# Altium PCB HEBoard_Ver2.PcbDoc
Units mil, origin at the board's own origin, x right, y up, seen from the top; angles counter-clockwise.
Board outline 2031.5 x 2885.83 mil, 2 copper layers (Top Layer, Bottom Layer); 23 components, 16 nets, 118 pads, 8 vias.
Unrouted connection lines stored in the file: 4.
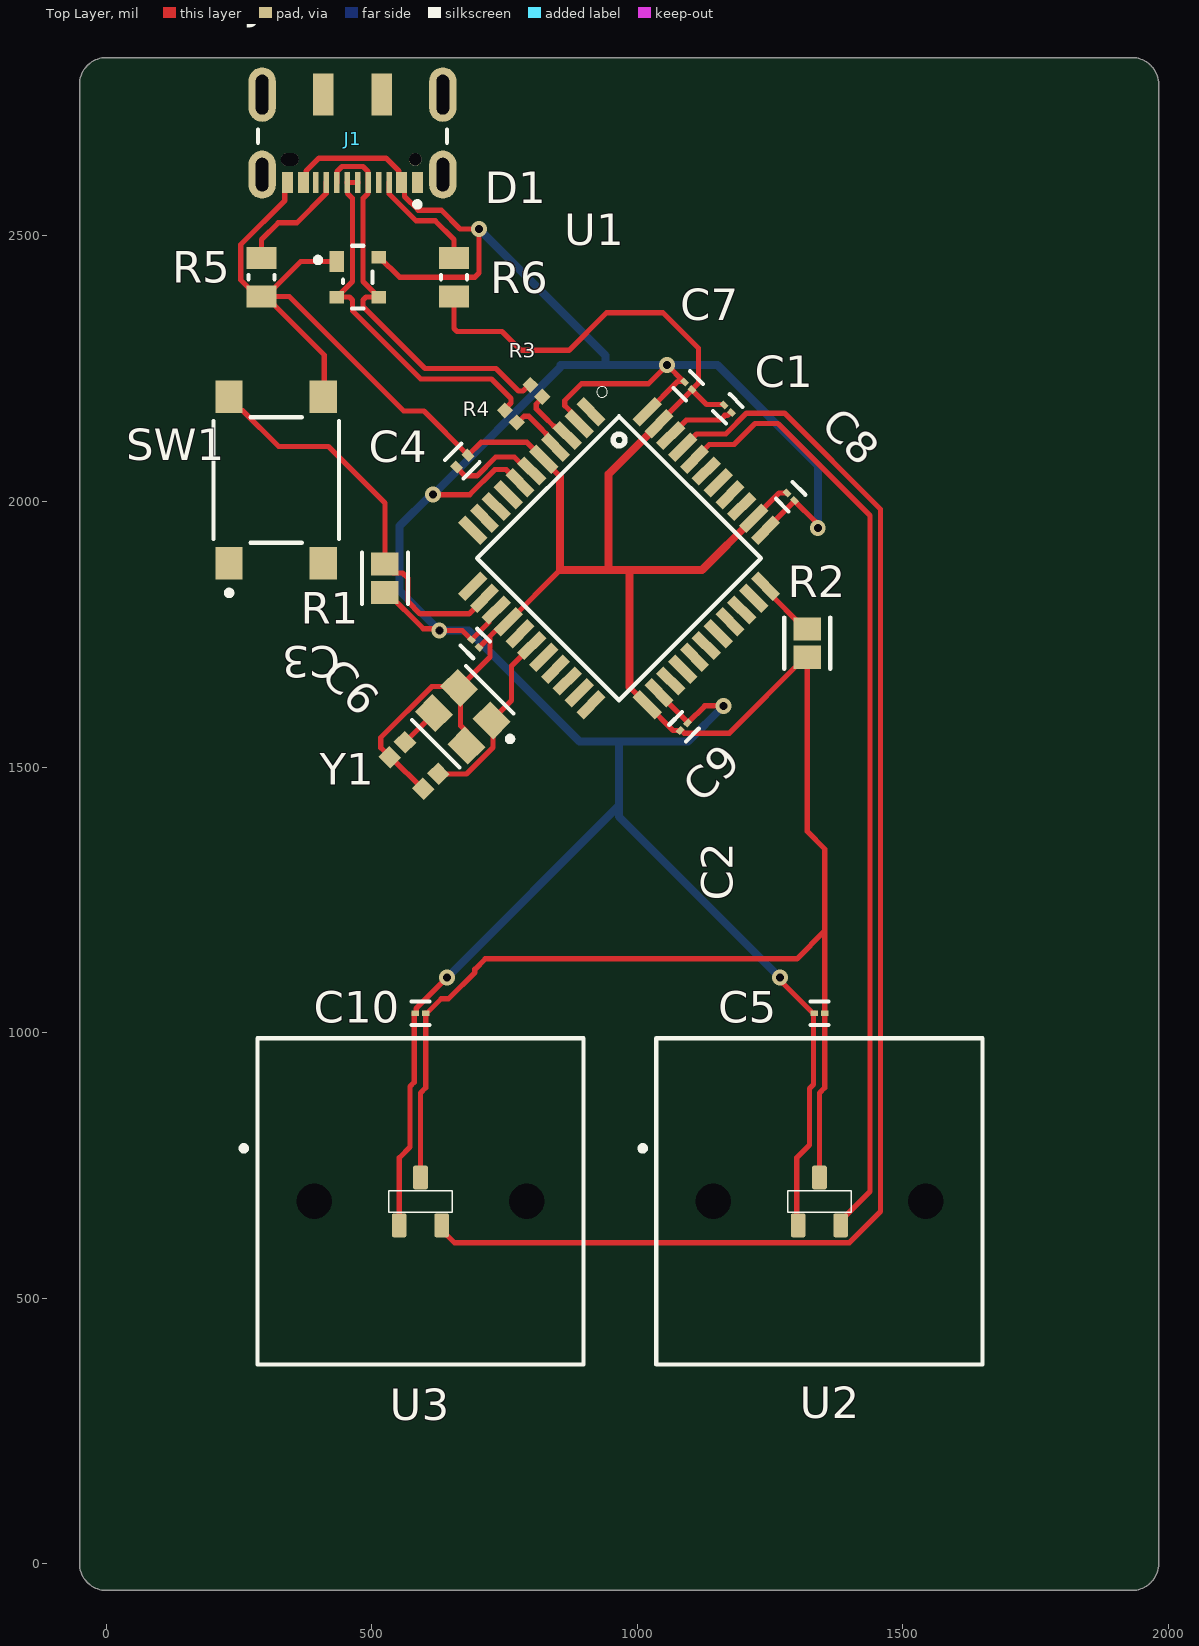
[diagram p0: Top Layer view]
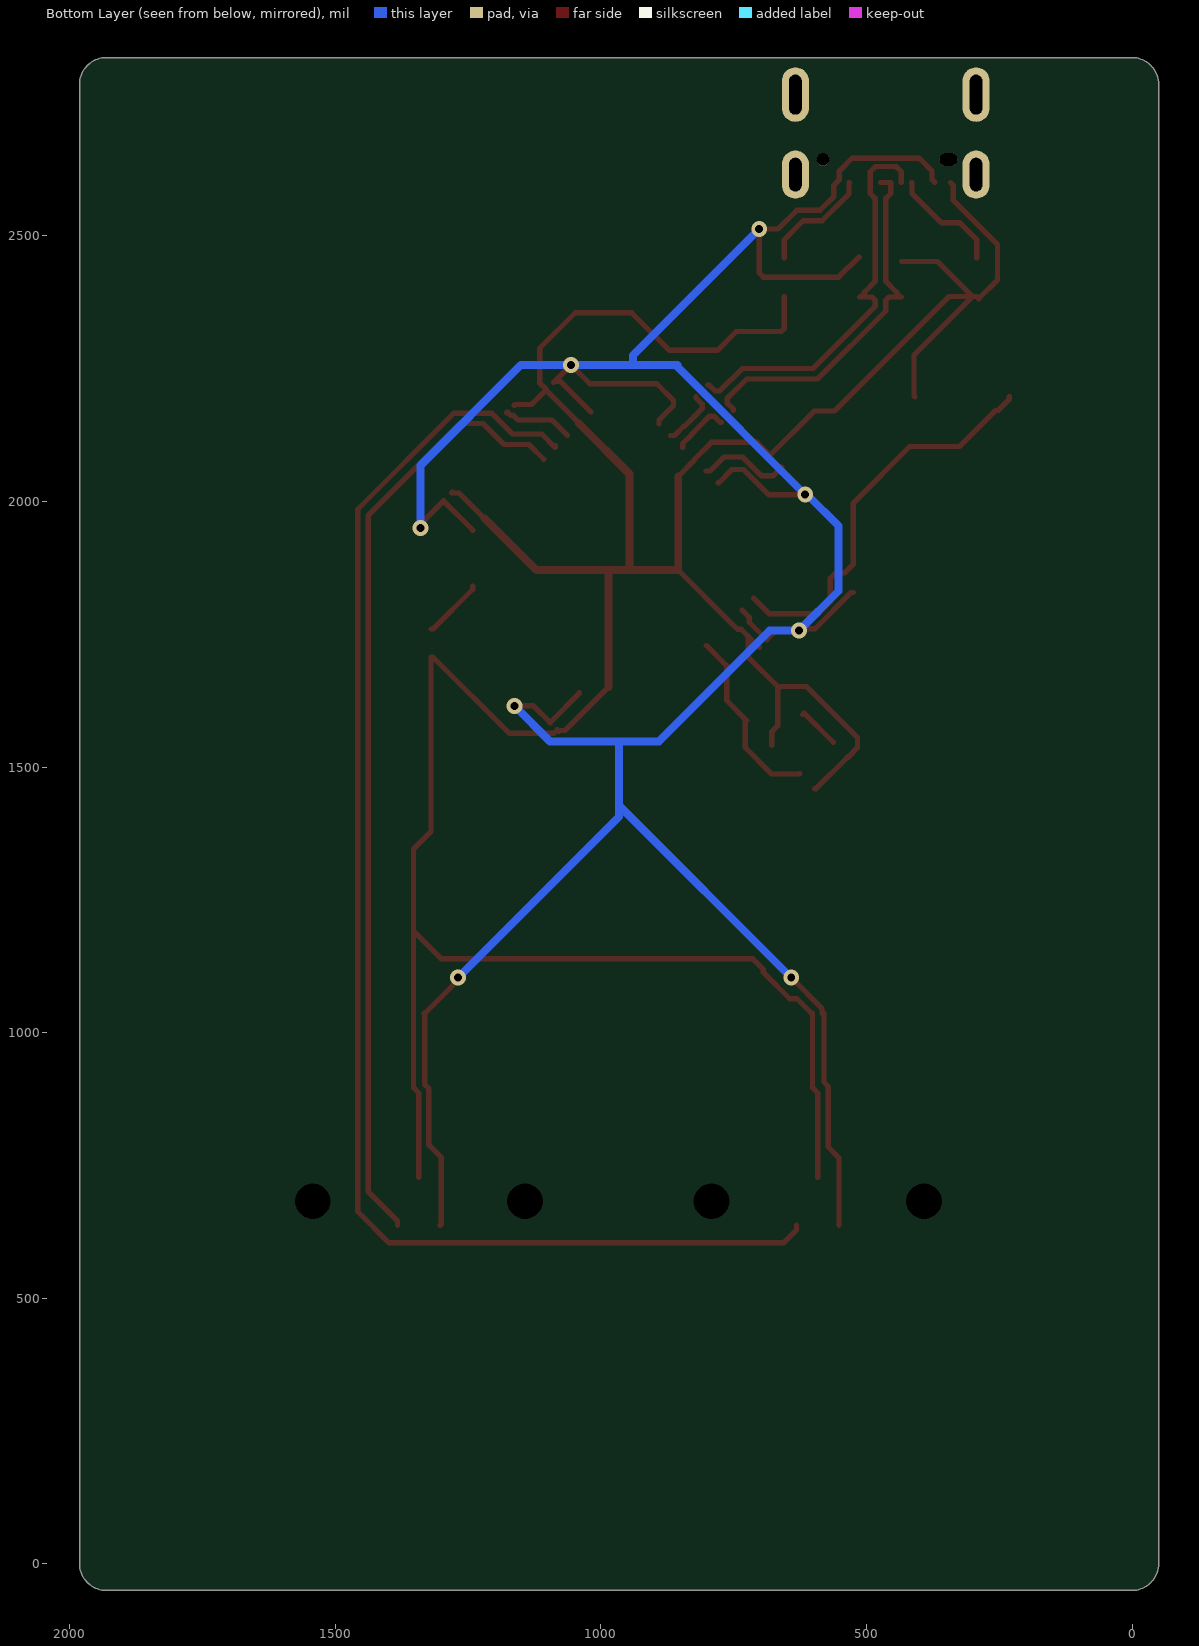
[diagram p1: Bottom Layer view, seen from below]
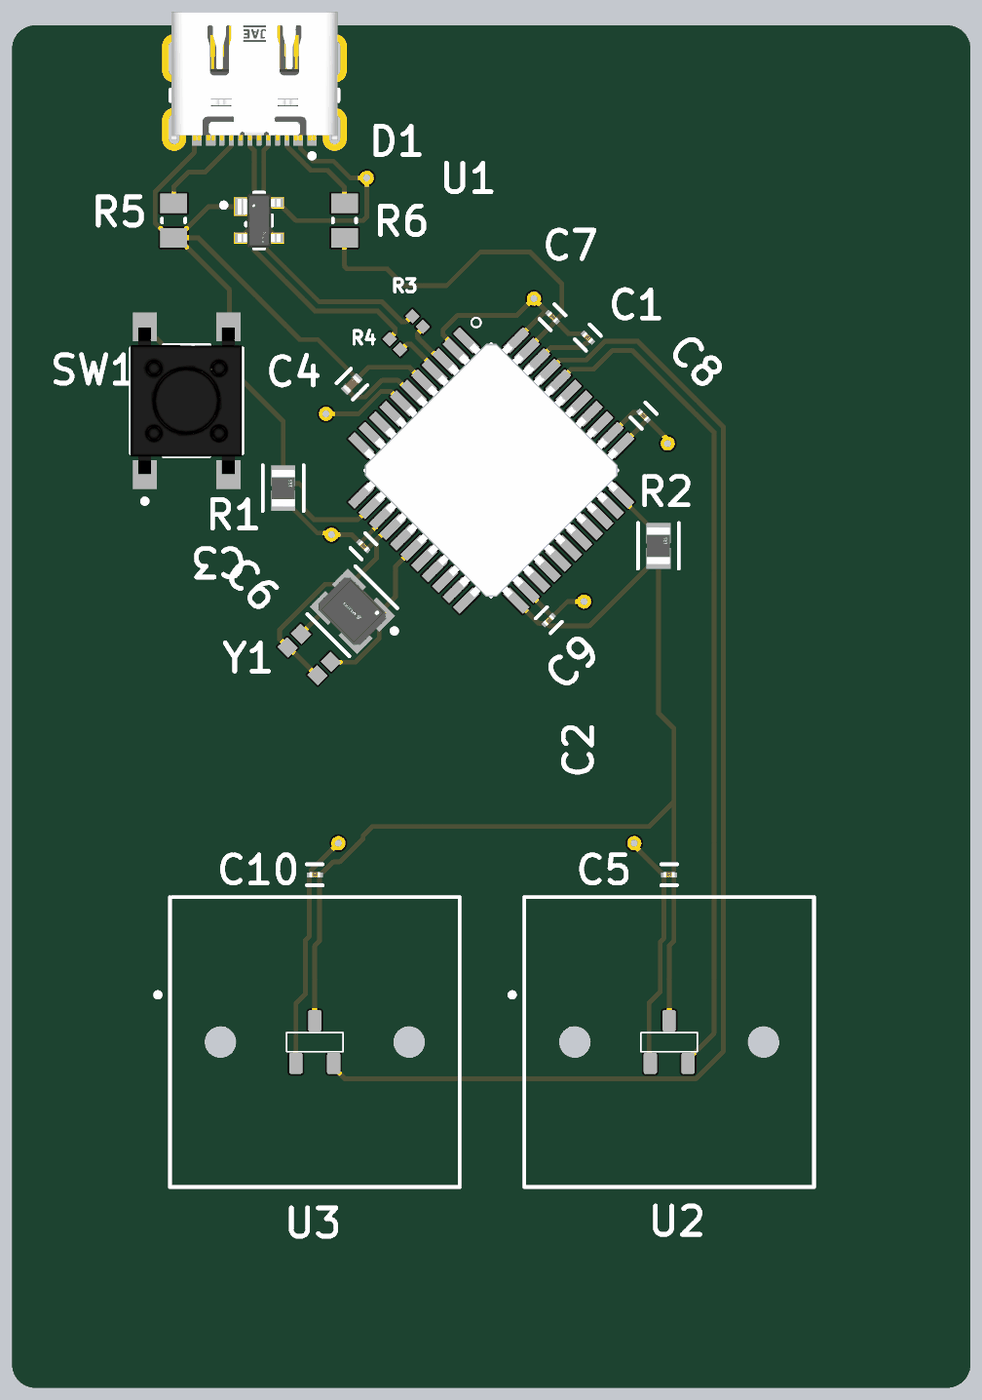
[diagram p2: 3D render of the assembled board from above, using the file's embedded part models]

## Layer stack, top to bottom
Top Solder: solder mask 0.4, Solder Resist, Dk 3.5
Top Layer: signal copper 1.4
Dielectric 1: dielectric 12.6, FR-4, Dk 4.8
Bottom Layer: signal copper 1.4
Bottom Solder: solder mask 0.4, Solder Resist, Dk 3.5

## Board outline
-50,0 ccw(c0,0) 0,-50 1931.5,-50 ccw(c1931.5,0) 1981.5,0 1981.5,2785.83 ccw(c1931.5,2785.83) 1931.5,2835.83 0,2835.83 ccw(c0,2785.83) -50,2785.83

## Design rules (kind name [scope] priority, off if disabled: settings)
Clearance [All] p1: gap=10 ignorepadtopadclearanceinfootprint=FALSE except(0: Arc-Hole Track-Hole SMDPad-Hole THPad-Hole Via-Hole Fill-Hole Poly-Hole Region-Hole Text-Hole; 5.51: Arc-Arc Arc-Track Arc-SMDPad Arc-Text Track-Track Track-SMDPad Track-Text SMDPad-SMDPad SMDPad-Text THPad-Text Via-Text Fill-Text Poly-Text Region-Text Text-Text)
DiffPairsRouting [All] p1: maxlimit=3937.01 minlimit=10 mostfreqgap=10 toplayer_mingap=0 toplayer_minwidth=10 toplayer_maxwidth=15 toplayer_prefwidth=10 bottomlayer_maxgap=10 bottomlayer_minwidth=15 bottomlayer_maxwidth=15 bottomlayer_prefwidth=15 maxuncoupledlength=500
MinimumSolderMaskSliver [All] p1: minsoldermaskwidth=2.76
PolygonConnect [All] p1: connectstyle=Relief reliefconductorwidth=10 reliefentries=4 polygonreliefangle="90 Angle" airgapwidth=10
RoutingVias [All] p1: holewidth=28 width=50 viastyle="Through Hole" minholewidth=15 minwidth=30 maxholewidth=28 maxwidth=50
SilkToSolderMaskClearance [IsPad] p1: minsilkscreentomaskgap=0.98 clearancetoexposedcopper=TRUE
SolderMaskExpansion [All] p1: expansion=4 istentingtop=FALSE
Width [InNet('D_P')] p1: maxlimit=15 minlimit=10 preferedwidth=10 toplayer_maxwidth=10 minimp=50.000000 maximp=50.000000 favimp=50.000000
27 further rules are at their usual default settings.

## Classes and differential pairs
differential pair D: +D_P -D_N

## Components (designator, comment, footprint, x,y, rotation, side; value= is the part's Value field where it differs from the comment)
C1 "0.1uF" FP-GRM033-0_03-IPC_C 1170.47,2174.41 r135 top
C2 "22pF" CAPC1006X50X20ML10T10 611.42,1473.62 r45 top
C3 "22pF" CAPC1006X50X20ML10T10 548.43,1532.68 r45 top
C4 "1uF" FP-GRM15-0_1-MFG 670.47,2075.98 r45 top
C5 "0.1uF" FP-GRM033-0_03-IPC_C 1342.91,1036.61 r0 top
C6 "0.1uF" FP-GRM033-0_03-IPC_C 694.89,1732.67 r315 top
C7 "0.1uF" FP-GRM033-0_03-IPC_C 1095.67,2217.72 r315 top
C8 "0.1uF" FP-GRM033-0_03-IPC_C 1288.58,2009.05 r135 top
C9 "0.1uF" FP-GRM033-0_03-IPC_C 1087.8,1575.98 r225 top
C10 "0.1uF" FP-GRM033-0_03-IPC_C 591.73,1036.61 r0 top
D1 "PRTR5V0U2X,215" FP-SOT143B-MFG 473.62,2422.44 r0 top
J1 "DX07S016JA1R1500" FP-DX07S016JA1R1500-MFG 463.78,2726.77 r180 top
R1 "10k 0.25W" FP-RNCP0805-IPC_C 524.8,1855.51 r270 top
R2 "10k 0.25W" FP-RNCP0805-IPC_C 1320.08,1733.46 r270 top
R3 "22R 1% 0201(0603)" RESC0201(0603)_M 809.92,2208.46 r135 top value="22.00 Ohm"
R4 "22R 1% 0201(0603)" RESC0201(0603)_M 761.83,2160.37 r135 top value="22.00 Ohm"
R5 "5.1K" RESC2013X60X30NL20T20 292.52,2422.44 r90 top
R6 "5.1K" RESC2013X60X30NL20T20 654.72,2422.44 r90 top
SW1 "" FP-PTS645SM43SMTR92LFS-MFG 320.08,2040.55 r90 top
U1 "ATMEGA32U4-AU" QFP80P1200X1200X120-44N 965.75,1893.21 r315 top
U2 "SS39ET" CHRY-MX1A-11NW_V 1342.91,682.28 r0 top
U3 "SS39ET" CHRY-MX1A-11NW_V 591.73,682.28 r0 top
Y1 "16 MHz" FP-ABM8G-MFG 671.27,1594.87 r135 top

## Footprints (in the part's own frame and the unit in brackets; to place one, negate y for a bottom-side part, rotate by r counter-clockwise, add the part's x,y. Pads: shape width x height; smd on the part's side, far side on the other; paste and mask are expansions set on the pad)
CAPC1006X50X20ML10T10 [mm] "Chip Capacitor, 2-Leads, Body 1.00x0.55mm, IPC Low Density"
  rect 0.74x0.8 smd: 1(-0.51,0) 2(0.51,0)
  body extent -0.55,-0.33 0.55,0.32, height 0.5
CHRY-MX1A-11NW_V [mil] "THD, 2-Leads, Body 15.6x15.6mm"
  rrect30% 28x45 smd: 1(-40,-45) 2(40,-45) 3(0,45)
  round 0 hole 67 unplated paste+0: MH2(-200,0) MH3(200,0)
  silkscreen extent -338,-307 307,307, body extent -307,-307 307,307, height 598
FP-ABM8G-MFG [mm]
  rect 1.4x1.2 smd paste+0 mask+0: 1(-1.1,-0.85) 2(1.1,-0.85) 3(1.1,0.85) 4(-1.1,0.85)
  silkscreen extent -2.47,-1.82 1.6,1.82, body extent -1.9,-1.55 1.9,1.55, height 0.25
FP-DX07S016JA1R1500-MFG [mm] "USB 3.1 Type C Receptacle Horizontal THR"
  rrect100% 1.3x2.3 hole 1.6 slot 0.6 at 0 deg paste-1000 mask+0: 1(-4.32,2.825) 2(4.32,2.825)
  rrect100% 1.3x2.6 hole 1.9 slot 0.6 at 0 deg paste-1000 mask+0: 3(-4.32,-1) 6(4.32,-1)
  rect 1x2 smd paste+0 mask+0: 4(-1.4,-1) 5(1.4,-1)
  rect 0.52x1 smd paste+0 mask+0: A1/B12(-3.1,3.2) A4/B9(-2.35,3.2) A12/B1(3.1,3.2) B4/A9(2.35,3.2)
  rect 0.27x1 smd paste+0 mask+0: A5(-1.75,3.2) A6(-0.25,3.2) A7(0.75,3.2) A8(1.75,3.2) B5(1.25,3.2) B6(0.25,3.2) B7(-0.75,3.2) B8(-1.25,3.2)
  round 0.6 hole 0.6 unplated paste-1000 mask+0: ""(-3,2.1)
  rrect100% 0.85x0.6 hole 0.6 slot 0.85 at 0 deg unplated paste-1000 mask+0: ""(3,2.1)
  silkscreen extent -4.52,0.67 4.52,4.37, body extent -5.07,-3.75 5.07,4.08, height 0.25
FP-GRM15-0_1-MFG [mm]
  rect 0.4x0.5 smd paste+0 mask+0: 1(-0.4,0) 2(0.4,0)
  silkscreen extent -0.55,-0.62 0.55,0.62, body extent -0.7,-0.38 0.7,0.38, height 0.25
FP-GRM033-0_03-IPC_C [mil]
  rect 13.94x10.34 smd paste+0 mask+0: 1(-10.01,0) 2(10.01,0)
  silkscreen extent -17,-22 17,22, body extent -21,-10 21,10, height 10
FP-PTS645SM43SMTR92LFS-MFG [mm]
  rect 1.55x1.3 smd paste+0 mask+0: 1(-3.975,2.25) 2(3.975,2.25) 3(-3.975,-2.25) 4(3.975,-2.25)
  silkscreen extent -5.52,-3 3,3, body extent -4.85,-3.1 4.85,3.1, height 0.25
FP-RNCP0805-IPC_C [mil]
  rect 43.52x51.5 smd paste+0 mask+0: 1(-26.63,0) 2(26.63,0)
  silkscreen extent -48,-43 48,43, body extent -52,-31 52,31, height 10
FP-SOT143B-MFG [mm]
  rect 0.7x1 smd paste-1000 mask+0: 1(-1,0.75)
  rect 0.7x0.6 smd paste-1000 mask+0: 2(-1,-0.95) 3(1,-0.95) 4(1,0.95)
  silkscreen extent -2.02,-1.5 0.7,1.5, body extent -1.5,-1.63 1.5,1.63, height 0.25
QFP80P1200X1200X120-44N [mm]
  rect 1.5x0.5 smd: 1(-5.9,4) 2(-5.9,3.2) 3(-5.9,2.4) 4(-5.9,1.6) 5(-5.9,0.8) 6(-5.9,0) 7(-5.9,-0.8) 8(-5.9,-1.6) 9(-5.9,-2.4) 10(-5.9,-3.2) 11(-5.9,-4) 23(5.9,-4) 24(5.9,-3.2) 25(5.9,-2.4) 26(5.9,-1.6) 27(5.9,-0.8) 28(5.9,0) 29(5.9,0.8) 30(5.9,1.6) 31(5.9,2.4) 32(5.9,3.2) 33(5.9,4)
  rect 0.5x1.5 smd: 12(-4,-5.9) 13(-3.2,-5.9) 14(-2.4,-5.9) 15(-1.6,-5.9) 16(-0.8,-5.9) 17(0,-5.9) 18(0.8,-5.9) 19(1.6,-5.9) 20(2.4,-5.9) 21(3.2,-5.9) 22(4,-5.9) 34(4,5.9) 35(3.2,5.9) 36(2.4,5.9) 37(1.6,5.9) 38(0.8,5.9) 39(0,5.9) 40(-0.8,5.9) 41(-1.6,5.9) 42(-2.4,5.9) 43(-3.2,5.9) 44(-4,5.9)
  silkscreen extent -6.45,-4.8 4.8,5.3, body extent -6,-6 6,6, height 0.53
RESC0201(0603)_M [mm] "Chip Resistor, Body 0.6x0.3mm, IPC Low Density"
  rect 0.55x0.55 smd: 1(-0.4,0) 2(0.4,0)
  body extent -0.31,-0.16 0.31,0.16, height 0.3
RESC2013X60X30NL20T20 [mm] "Chip Resistor, 2-Leads, Body 2.00x1.25mm, IPC Medium Density"
  rect 1.05x1.45 smd: 1(-0.925,0) 2(0.925,0)
  silkscreen extent -0.1,-0.63 0.1,0.63, body extent -1.1,-0.72 1.1,0.72, height 0.6

## Part data
C1 C5 C6 C7 C8 C9 C10: library part CMP-2010-01264-2, "Chip Multilayer Ceramic Capacitors for General Purpose, 0201, 0.10uF, X5R, 15%, 10%, 10V", Capacitance=100nF, Case Code (Imperial)=0201, Case Code (Metric)=0603, Dielectric=X5R, Max Operating Temperature=85°C, Min Operating Temperature=-55°C, Package Quantity=1, Tolerance=10%, Voltage=10V, Case/Package=0201, Depth=0.3mm, Height=0.3mm, Lead Free="Lead Free", Length=0.6mm, Mount="Surface Mount", Packaging="Tape and Reel", Radiation Hardening=No, REACH SVHC="No SVHC", Termination=SMD/SMT, Thickness=0.013inch, Voltage Rating=10V, Voltage Rating (DC)=10V, Weight=6E-06oz, Width=0.012inch
C2 C3: library part CMP-2008-04844-1, Manufacturer="AVX Interconnect / Elco", Part Number=0402ZK220GBSTR..
C4: library part CMP-2008-04556-2, "CAP CER 1UF 10V X5R 0402", Manufacturer=Murata, Manufacturer Part Number=GRM155R61A105KE15D, Package=GRM15-0.1, Temperature="-55°C to +85°C", Temperature Characteristic=X5R, Temperature Coefficient=15%, Temperature Range High=+85°C, Temperature Range Low=-55°C, Tolerance=10%, Voltage Rating=10V, Automotive=No, Capacitance=1uF, Category=Cap, ComponentLink2Description=Datasheet, ComponentLink2URL=https://search.murata.co.jp/Ceramy/image/img/A01X/G101/ENG/GRM155R61A105KE15-01A.pdf, Device Class L1="Passive Components", Device Class L2=Capacitors, Device Class L3="Ceramic Capacitors", Digikey Description="CAP CER 1UF 10V X5R 0402", Height=0.55mm, Ipc Land Pattern Name=CAPC10050X50, Lead Free=Yes, Material=Ceramic, Mouser Description="0402 1 uF 10 V ±10% Tolerance X5R Surface Mount Multilayer Ceramic Capacitor", Octopart=https://octopart.com/grm155r61a105ke15d-murata-197442, RoHS=TRUE
D1: library part CMP-14436-000007-1, "TVS DIODE 5.5V SOT143B"
J1: library part CMP-19038-000003-1, "CONN RCP USB2.0 TYP C 24P SMD RA"
R1 R2: library part CMP-26527-007436-1, "10kΩ ±1% 0.25W 0805 High Power Anti-Sulfur Thin Film Chip Resistor", Case Code (Imperial)=0805, Case Code (Metric)=2012, Max Operating Temperature=155°C, Max Power Dissipation=250mW, Min Operating Temperature=-55°C, Resistance=10kR, Resistor Type="Thin Film", Temperature Coefficient=100ppm/°C, Tolerance=1%, Case/Package=0805, Features="Moisture Resistant", Height=0.024inch, Lead Free="Lead Free", Length=0.079inch, Mount="Surface Mount", Number of Terminations=2, Packaging="Tape and Reel", RoHS Compliant=Yes, Series=RNCP, Width=0.049inch
R3 R4: library part CMP-1010-00226-1, "22R 0.05W 1% 0201 (0603 Metric)  SMD", Case-EIA=0201, Case-Metric=0603, Power="0.05 W", Tolerance="1 %", Technology=SMT
R5 R6: library part CMP-2001-02431-1, Manufacturer="KOA Speer", Part Number=RK73H2ATTD5101F
SW1: library part CMP-2000-05160-2, "SWITCH TACTILE SPST-NO 0.05A 12V", Case/Package=SMD/SMT, Color=Black, Contact Resistance=100mR, Current Rating=50mA, Max Operating Temperature=60°C, Max Voltage Rating (DC)=12V, Min Operating Temperature=-20°C, Operating Force=160gf, Package Quantity=1, Actuator Length=0.85mm, Actuator Material=Nylon, Actuator Type=Standard, Contact Material=Silver, Contact Plating=Silver, Depth=9mm, Illumination Type=Non-Illuminated, Lead Free="Lead Free", Length=6mm, Max Current Rating=50mA, Mechanical Life=100000Cycles, Mount="Surface Mount", Orientation=Straight, Packaging="Tape and Reel", REACH SVHC="No SVHC", Switch Function=Off-Mom, Termination="Gull Wing", Throw Configuration=SPST, Voltage Rating (DC)=12V
U1: "AVR AVRÂ® ATmega Microcontroller IC 8-Bit 16MHz 32KB (16K x 16) FLASH 44-TQFP (10x10)", Package="TQFP-44 Microchip", Availability="In Stock", MF="Microchip Technology", MP=ATMEGA32U4-AU, Price=None, Purchase-URL=https://pricing.snapeda.com/search/part/ATMEGA32U4-AU/?ref=eda
U2 U3: "analog Hall Effect Sensor 1.5 mA 2.7 - 6.5 V dc", Package=None, Check_prices=https://www.snapeda.com/parts/SS39ET/Honeywell+Sensing+and+Productivity+Solutions/view-part/?ref=eda, MF="Honeywell Sensing and Productivity Solutions", MP=SS39ET, SnapEDA_Link=https://www.snapeda.com/parts/SS39ET/Honeywell+Sensing+and+Productivity+Solutions/view-part/?ref=snap
Y1: library part CMP-27762-015134-1, "Crystal 16MHz ±30ppm (Tol) ±30ppm (Stability) 10pF FUND 80Ω 4-Pin SMD T/R", Case/Package=SMD/SMT, ESR (Equivalent Series Resistance)=80R, Frequency=16MHz, Frequency Stability=30ppm, Load Capacitance=10pF, Max Operating Temperature=60°C, Min Operating Temperature=-10°C, Depth=2.5mm, Frequency Tolerance=30ppm, Height=0.039inch, Lead Free="Lead Free", Length=3.2mm, Mount="Surface Mount", Number of Pins=4, Packaging="Tape and Reel", REACH SVHC="No SVHC", Series=ABM8G, Series Resistance=80R, Width=0.098inch

## Via types
v1: diameter 30, hole 15, Top Layer to Bottom Layer, 8 vias

## Nets (pads, with @x,y where several pads share a name; then routed paths per layer and width w, separated by ;. In a path a pad name is that pad's centre, name@x,y a point inside that pad or via, vN(x,y) a via of type N, cw(c..) or ccw(c..) an arc to the next point about the centre after c; other vN are vias at no path point)
+5V: C5.1 C6.1 C7.1 C8.1 C9.1 C10.1 D1.4 J1.A4/B9 J1.B4/A9 R1.2 U1.2 U1.7 U1.14 U1.24 U1.34 U1.44 U2.1 U3.1 | length 6305.4
  Top Layer w10: J1.B4/A9 376.5,2606.02 376.5,2622.27 400.72,2646.5 526.83,2646.5 551.06,2622.27 551.06,2606.02 J1.A4/B9 561.54,2595.55 561.54,2574.68 587.8,2548.43 631.1,2548.43 666.54,2512.99 v1(701.97,2512.99) 701.97,2430.31 694.09,2422.44 552.36,2422.44 514.96,2459.84 D1.4 ; R1.2 528.79,1828.88 597.17,1760.51 623.74,1760.51 v1(627.17,1757.09) 670.47,1757.09 C6.1 720.77,1772.71 720.77,1782.01 U1.14@734.53,1795.77 ; U3.1 551.73,764.33 572.05,784.65 572.05,898.82 579.92,906.69 579.92,1036.44 580.09,1036.61 C10.1 583.52,1036.61 583.69,1036.79 583.69,1045.57 v1(641.66,1103.54) ; v1(615.35,2012.99) 684.54,2012.99 731.78,2060.24 753.15,2060.24 778.2,2035.19 U1.7 ; U1.2 890.58,2153.39 863.39,2180.59 863.39,2190.16 894.94,2221.71 1020.92,2221.71 v1(1056.3,2257.09) C7.1@1087.32,2226.07 ; U1.44 1075.9,2226.07 C7.1@1087.32,2226.07 ; U1.24 1040.91,1638.45 1095.47,1583.9 C9.1@1095.47,1583.65 ; C7.1 C7.1@1087.32,2226.07 ; C9.1 C9.1@1095.47,1583.65 ; v1(1162.6,1615.35) 1127.17,1615.35 C9.1@1095.47,1583.65 ; U1.34 1296.32,2001.07 C8.1@1296.32,2001.32 ; v1(1268.9,1103.54) 1268.9,1098.82 1331.1,1036.61 C5.1@1332.06,1036.61 ; C8.1 C8.1@1296.32,2001.32 ; U2.1 1300.39,639.8 1300.39,764.96 1324.02,788.58 1324.02,894.88 1331.89,902.76 1331.89,1036.44 C5.1@1332.06,1036.61 ; C5.1 C5.1@1332.06,1036.61 ; v1@1337.63,1950 v1(1339.76,1950) 1335.94,1953.83 1335.94,1961.7 C8.1@1296.32,2001.32
  Bottom Layer w15: v1(641.66,1103.54) 965.75,1427.63 ; v1(701.97,2512.99) 939.88,2275.08 939.88,2257.09 ; v1(1162.6,1615.35) 1095.67,1548.43 965.75,1548.43 ; v1(1268.9,1103.54) 965.75,1406.69 965.75,1427.63 ; v1(1339.76,1950) 1339.76,2068.11 1150.79,2257.09 v1(1056.3,2257.09) 939.88,2257.09 ; 939.88,2257.09 855.51,2257.09 855.51,2253.15 v1(615.35,2012.99) 611.42,2012.99 552.36,1953.94 552.36,1831.89 v1(627.17,1757.09) 682.28,1757.09 890.94,1548.43 965.75,1548.43 ; 965.75,1427.63 965.75,1548.43
D_N: D1.3 J1.A7 J1.B7 R3.1 R3.2 U1.3 | length 875.2
  Top Layer w10: J1.A7 434.57,2601.1 434.57,2621.28 444.27,2630.98 483.29,2630.98 492.99,2621.28 492.99,2601.1 J1.B7 492.99,2600.47 492.99,2580.29 483.62,2570.92 483.62,2414.41 504.21,2393.82 504.21,2391.85 D1.3@511.02,2385.04 ; D1.3 D1.3@511.02,2385.04 ; R3.2 796.25,2219.6 784.69,2208.03 776.4,2208.03 733.76,2250.68 600.55,2250.68 483.62,2367.61 483.62,2379.18 489.48,2385.04 D1.3@511.02,2385.04 ; R3.1 821.06,2194.8 809.49,2183.23 809.49,2174.95 824.09,2160.35 842.76,2141.69 844.04,2141.69 861.46,2124.27 U1.3
D_P: D1.2 J1.A6 J1.B6 R4.1 R4.2 U1.4 | length 803.8
  Top Layer w10: D1.2 D1.2@436.22,2385.04 ; J1.A6 J1.B6 454.25,2600.47 454.25,2580.29 463.62,2570.92 463.62,2414.41 443.03,2393.82 443.03,2391.85 D1.2@436.22,2385.04 ; R4.2 750.7,2174.04 762.26,2185.61 762.26,2193.89 725.47,2230.68 592.26,2230.68 463.62,2359.32 463.62,2379.18 457.76,2385.04 D1.2@436.22,2385.04 ; R4.1 775.5,2149.24 787.06,2160.8 795.35,2160.8 815.8,2140.35 828.62,2127.55 828.62,2126.27 846.04,2108.85 U1.4
GND: C1.2 C2.1 C3.1 C4.2 C5.2 C6.2 C7.2 C8.2 C9.2 C10.2 D1.1 J1.A1/B12 J1.A12/B1 R2.2 R5.1 R6.1 SW1.4 U1.5 U1.15 U1.23 U1.35 U1.43 U2.3 U3.3 Y1.2 Y1.4 | length 6755.7
  Top Layer w10: R5.1@288.58,2382.09 253.46,2417.2 253.46,2483.88 336.5,2566.91 336.5,2595.55 J1.A12/B1 ; R5.1 R5.1@300.39,2386.02 ; SW1.4 410.63,2199.02 410.63,2275.79 R5.1@300.39,2386.02 ; D1.1 366.34,2451.97 R5.1@300.39,2386.02 ; U3.3 591.73,886.59 601.74,896.6 C10.2 603.54,1036.61 630.88,1063.95 644.5,1063.95 694.09,1113.55 694.09,1119.29 713.78,1138.98 1300.39,1138.98 1352.74,1191.32 1352.93,1191.32 ; C2.1 595.25,1459.42 536.2,1518.48 C3.1 534.23,1519.32 516.93,1536.61 516.93,1555.61 613.25,1651.94 Y1.2@661.53,1651.94 ; R6.1 654.72,2325.94 660.58,2320.08 745.28,2320.08 780.71,2284.65 871.26,2284.65 942.13,2355.51 1048.43,2355.51 1115.35,2288.58 1115.35,2223.24 C7.2 C7.2@1103.19,2210.19 ; Y1.4 678.23,1566.92 667.1,1578.06 667.1,1646.37 Y1.2 722.8,1707.64 722.8,1746.42 ; C6.2 722.8,1746.42 ; 854.39,1870.94 U1.15 743.04,1759.58 735.96,1759.58 722.8,1746.42 ; 854.39,2047.38 823.77,2078 U1.5 792.08,2111.42 705.91,2111.42 C4.2 598.26,2170.47 560.24,2170.47 344.68,2386.02 R5.1@300.39,2386.02 ; 985.43,1650.81 U1.23 1067.34,1568.9 1077.93,1568.9 1079.2,1567.63 1079.44,1567.63 C9.2 1081.99,1570.18 1082.23,1570.18 1088.44,1563.97 1173.22,1563.97 1316.09,1706.84 R2.2 1320.08,1378.87 1352.93,1346.02 1352.93,1191.32 ; U1.43 1040.91,2147.67 1103.19,2209.95 C7.2@1103.19,2210.19 ; C1.2 1162.12,2182.76 1130.62,2182.76 C7.2@1103.19,2210.19 ; U1.35 1266.84,2016.13 1278.72,2016.13 1279.99,2017.41 1280.23,2017.41 C8.2 ; U2.3 1342.91,886.59 1352.93,896.6 C5.2 1352.93,1191.32
  Top Layer w15: 854.39,2047.38 854.39,1870.94 946.06,1870.94 ; 985.43,1650.81 985.43,1870.94 ; U1.43 946.06,2051.69 946.06,1870.94 ; U1.35 1121.65,1870.94 985.43,1870.94 ; 946.06,1870.94 985.43,1870.94
KEY_1: U1.40 U2.2 | length 1789.3
  Top Layer w10: U1.40 1135.48,2107.48 1182.28,2107.48 1221.65,2146.85 1264.96,2146.85 1438.19,1973.62 1438.19,701.06 1382.91,645.78 U2.2
KEY_2: U1.41 U3.2 | length 2668.7
  Top Layer w10: U3.2 631.73,628.78 656.24,604.27 1398.81,604.27 1457.87,663.34 1457.87,1985.43 1276.77,2166.54 1205.91,2166.54 1166.54,2127.17 1111.42,2127.17 1086.25,2102 U1.41 U1.41@1085.46,2105.14
NetC1_1: C1.1 U1.42 | length 133.3
  Top Layer w10: U1.42 1092.31,2153.4 1155.89,2153.4 1164.85,2162.36 1169.8,2162.36 1176.04,2168.6 1176.28,2168.6 C1.1
NetC2_2: C2.2 U1.17 Y1.1 | length 348.4
  Top Layer w10: C2.2 626.45,1486.98 678.47,1486.98 728.34,1536.85 728.34,1585.13 Y1.1 763.15,1625.51 763.15,1690.61 U1.17
NetC3_2: C3.2 U1.16 Y1.3 | length 81.4
  Top Layer w10: C3.2 616.99,1601.24 Y1.3 Y1.3@619.77,1599.05
NetC4_1: C4.1 U1.6 | length 174.6
  Top Layer w10: C4.1 675.76,2048.43 698.03,2048.43 733.46,2083.86 768.25,2083.86 794.65,2057.46 U1.6
NetJ1_A5: J1.A5 R6.2 | length 213.4
  Top Layer w10: J1.A5 532.99,2600.47 532.99,2579.31 583.56,2528.74 619.29,2528.74 654.72,2493.31 R6.2
NetJ1_A6: 
NetJ1_A7: 
NetJ1_B5: J1.B5 R5.2 | length 212.8
  Top Layer w10: R5.2 292.52,2493.31 324.02,2524.8 358.76,2524.8 414.25,2580.29 414.25,2600.47 J1.B5
NetR1_1: R1.1 SW1.2 U1.13 | length 758.4
  Top Layer w10: SW1.2 231.5,2192.13 252.09,2171.54 257.01,2171.54 325,2103.54 418.5,2103.54 524.8,1997.24 R1.1 541.57,1865.38 558.24,1865.38 568.11,1855.51 568.11,1811.5 591.03,1788.58 682.95,1788.58 U1.13
NetR2_1: R2.1 U1.33 | length 115.2
  Top Layer w10: U1.33 1241.35,1834.83 1316.09,1760.09 R2.1
pads on no net: J1. J1.1 J1.2 J1.3 J1.4 J1.5 J1.6 J1.A8 J1.B8 SW1.1 SW1.3 U1.1 U1.8 U1.9 U1.10 U1.11 U1.12 U1.18 U1.19 U1.20 U1.21 U1.22 U1.25 U1.26 U1.27 U1.28 U1.29 U1.30 U1.31 U1.32 U1.36 U1.37 U1.38 U1.39 U2.MH2 U2.MH3 U3.MH2 U3.MH3

## Silkscreen, mask and mechanical layers (free items; w line width, h text height)
Mechanical 1:
  lines w10: -50,0 ccw(c0,0) 0,-50 1931.5,-50 ccw(c1931.5,0) 1981.5,0 1981.5,2785.83 ccw(c1931.5,2785.83) 1931.5,2835.83 0,2835.83 ccw(c0,2785.83) -50,2785.83 -50,123.23 -50,0